# Altium PCB Test Plates - SMD to PLS Adapters.PcbDoc
Units mm, origin at the board's own origin, x right, y up, seen from the top; angles counter-clockwise.
Board outline 152.4 x 101.6 mm, 2 copper layers (Top Layer, Bottom Layer); 46 components, 53 nets, 154 pads, 0 vias.
Unrouted connection lines stored in the file: 27.
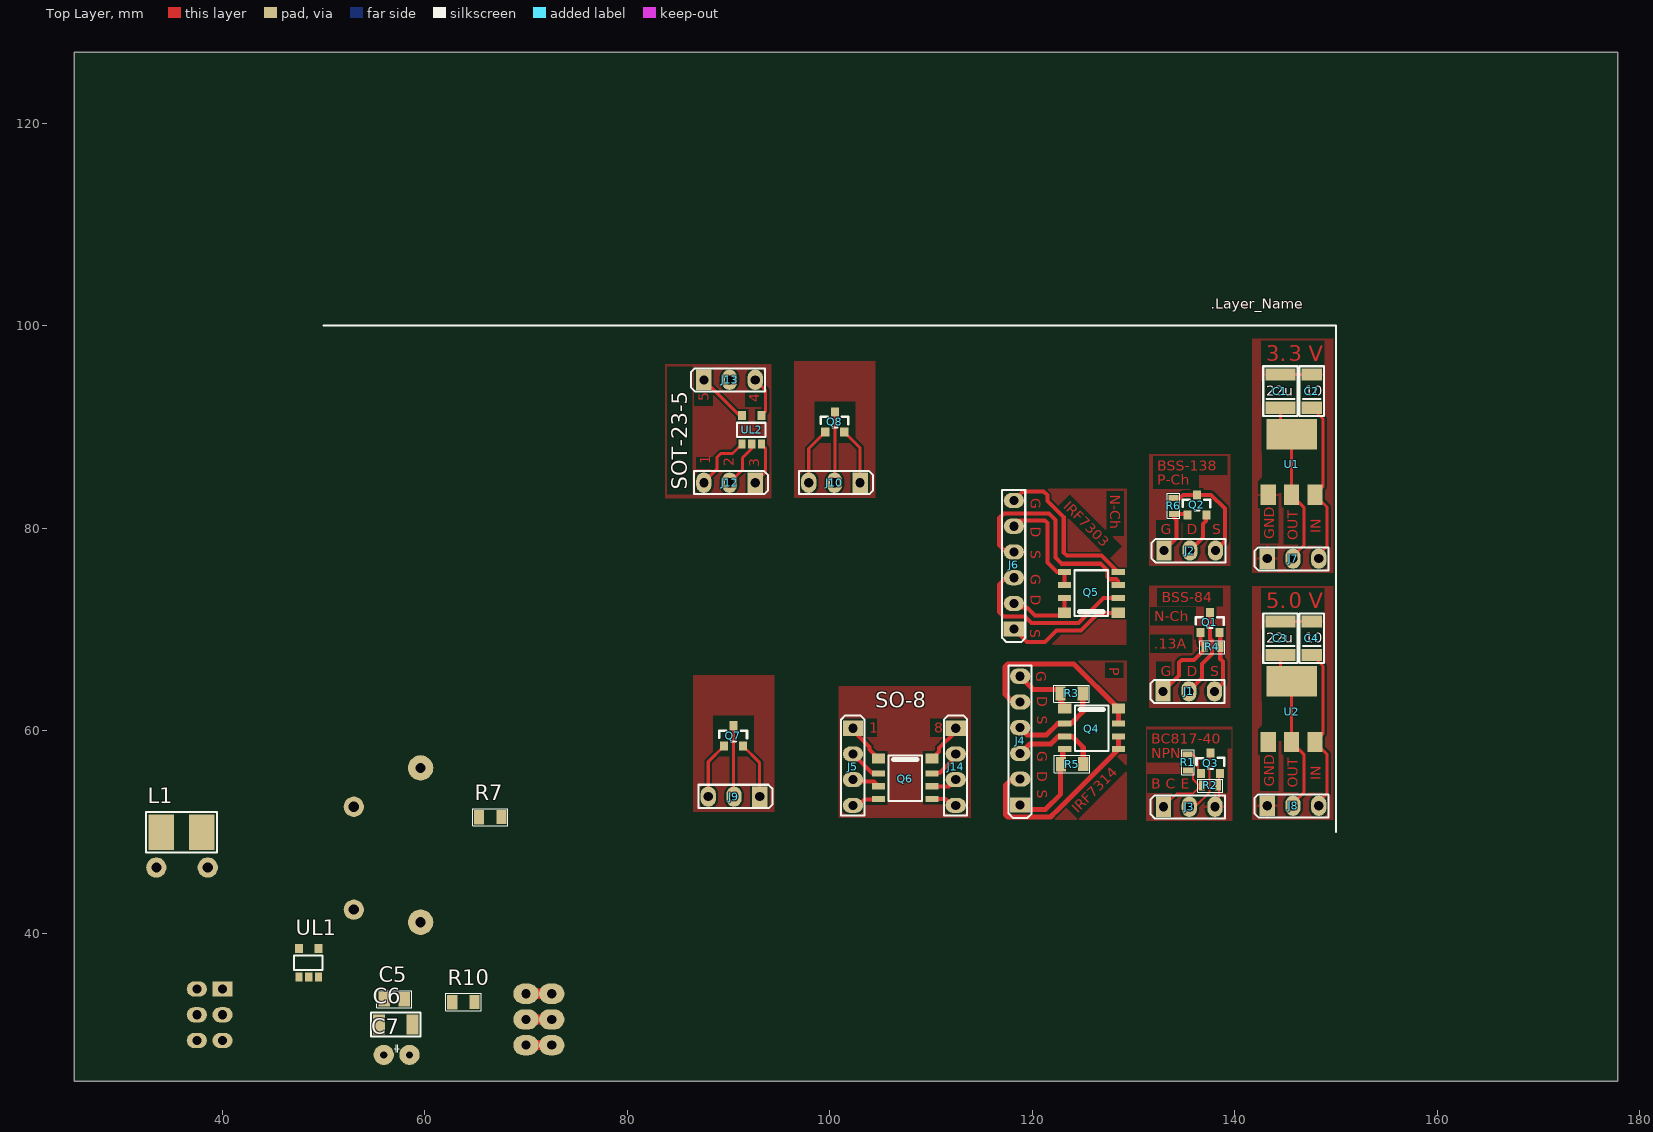
[diagram p0: Top Layer view]
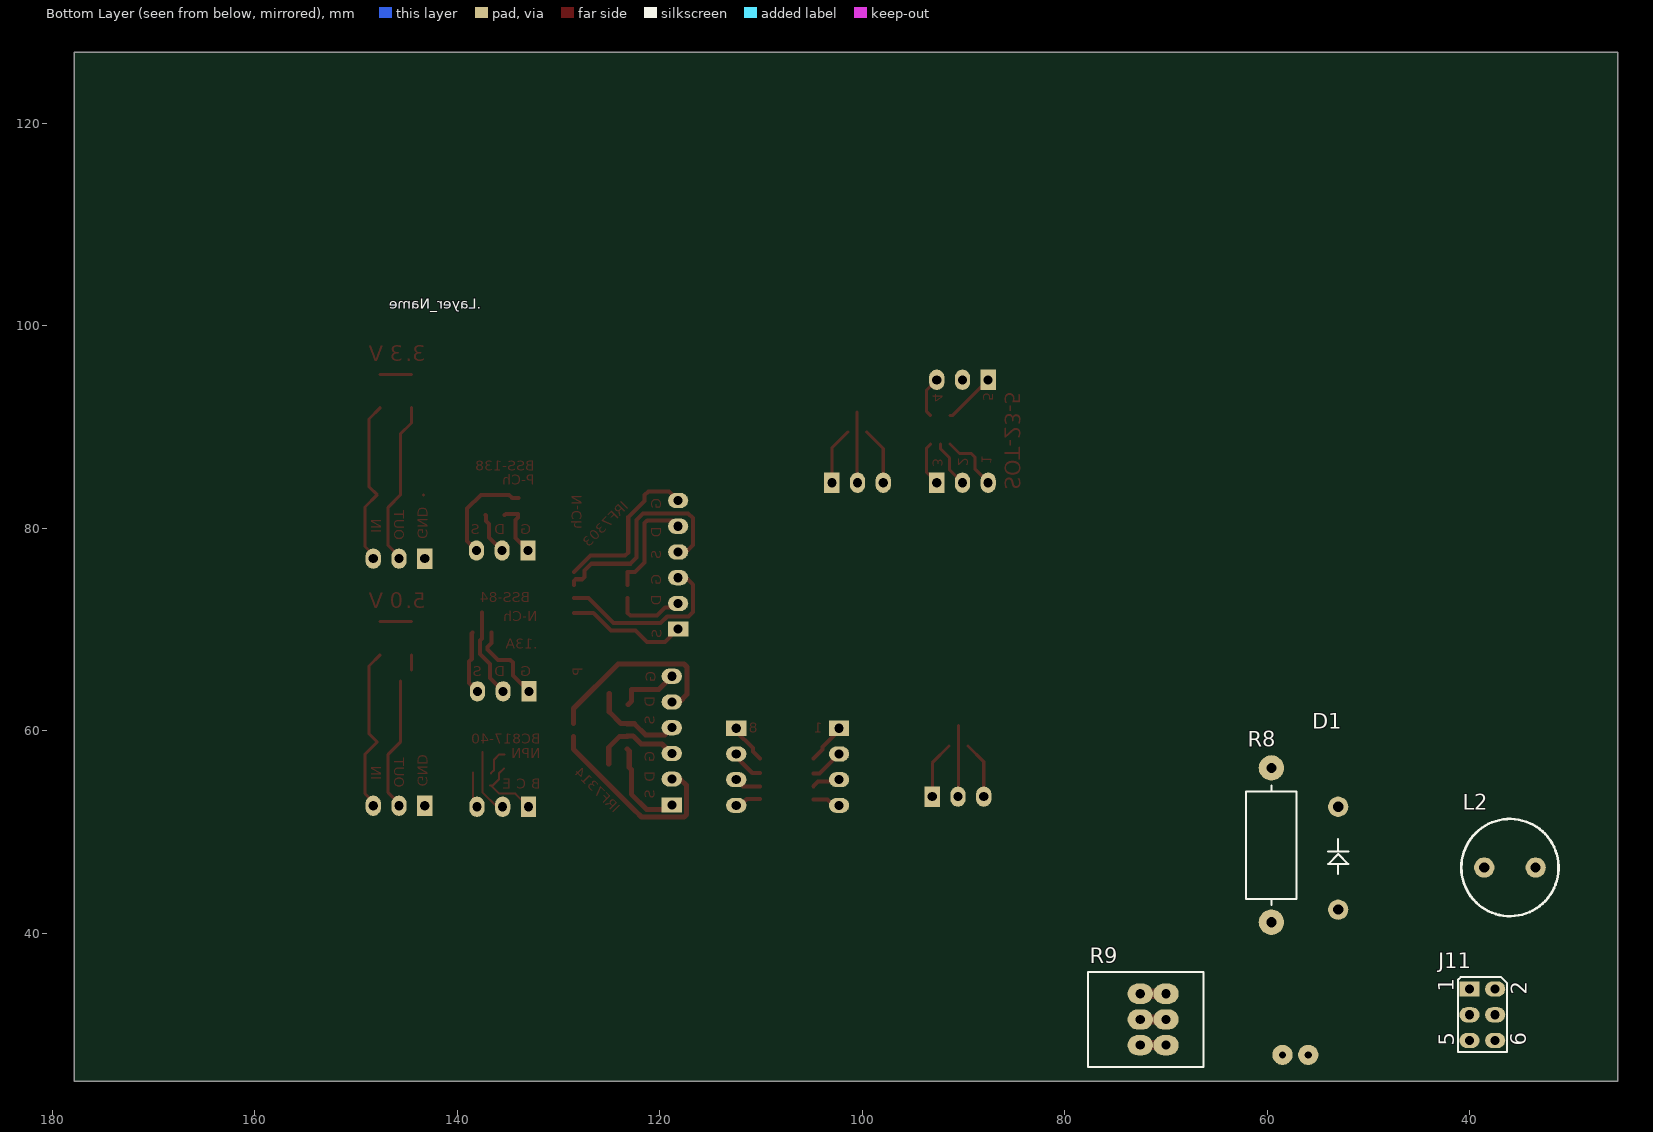
[diagram p1: Bottom Layer view, seen from below]
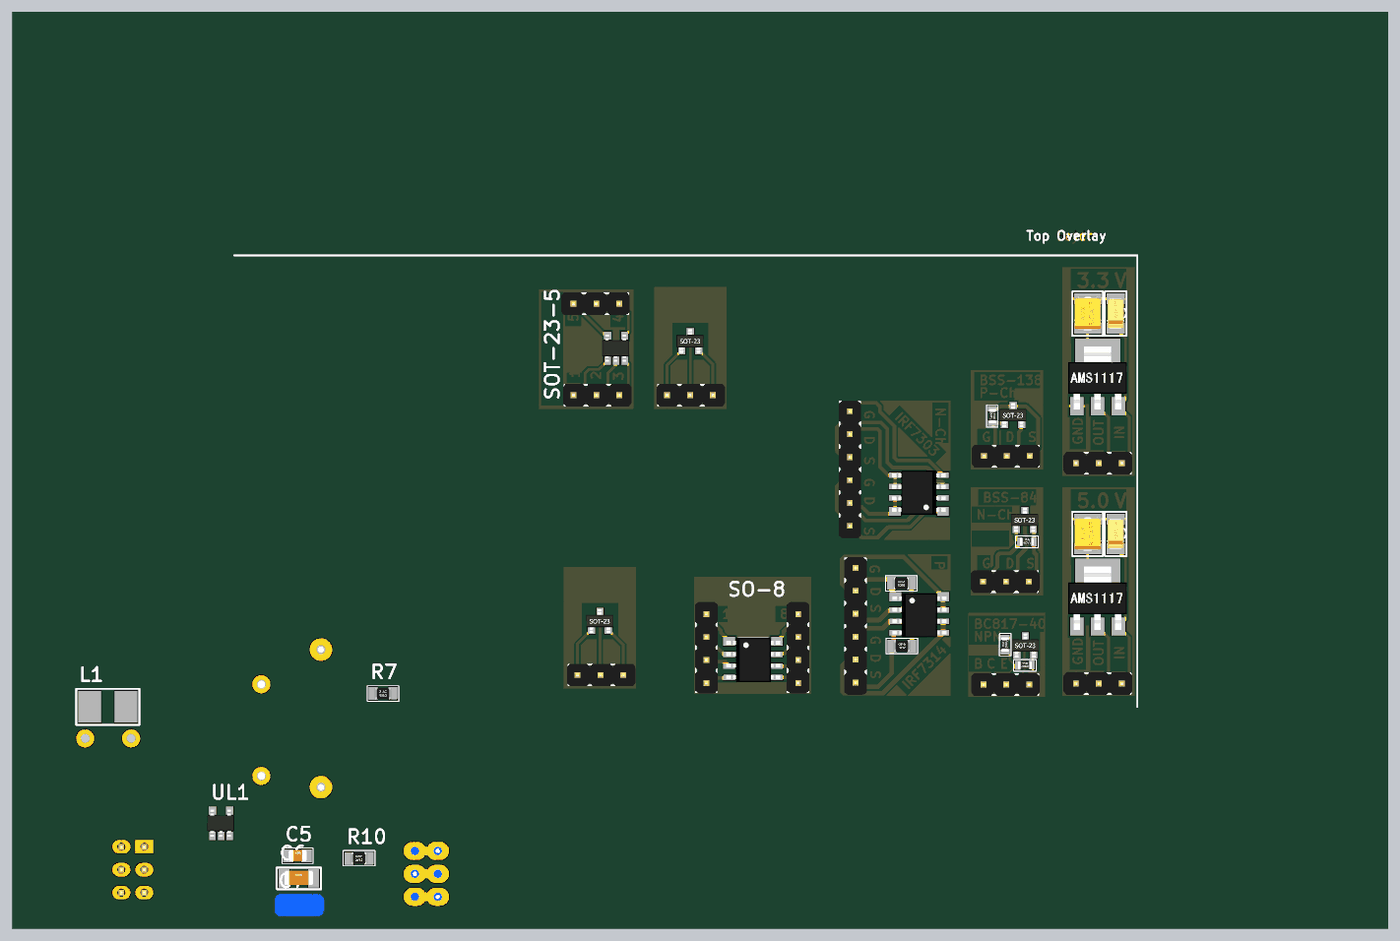
[diagram p2: 3D render of the assembled board from above, using the file's embedded part models]
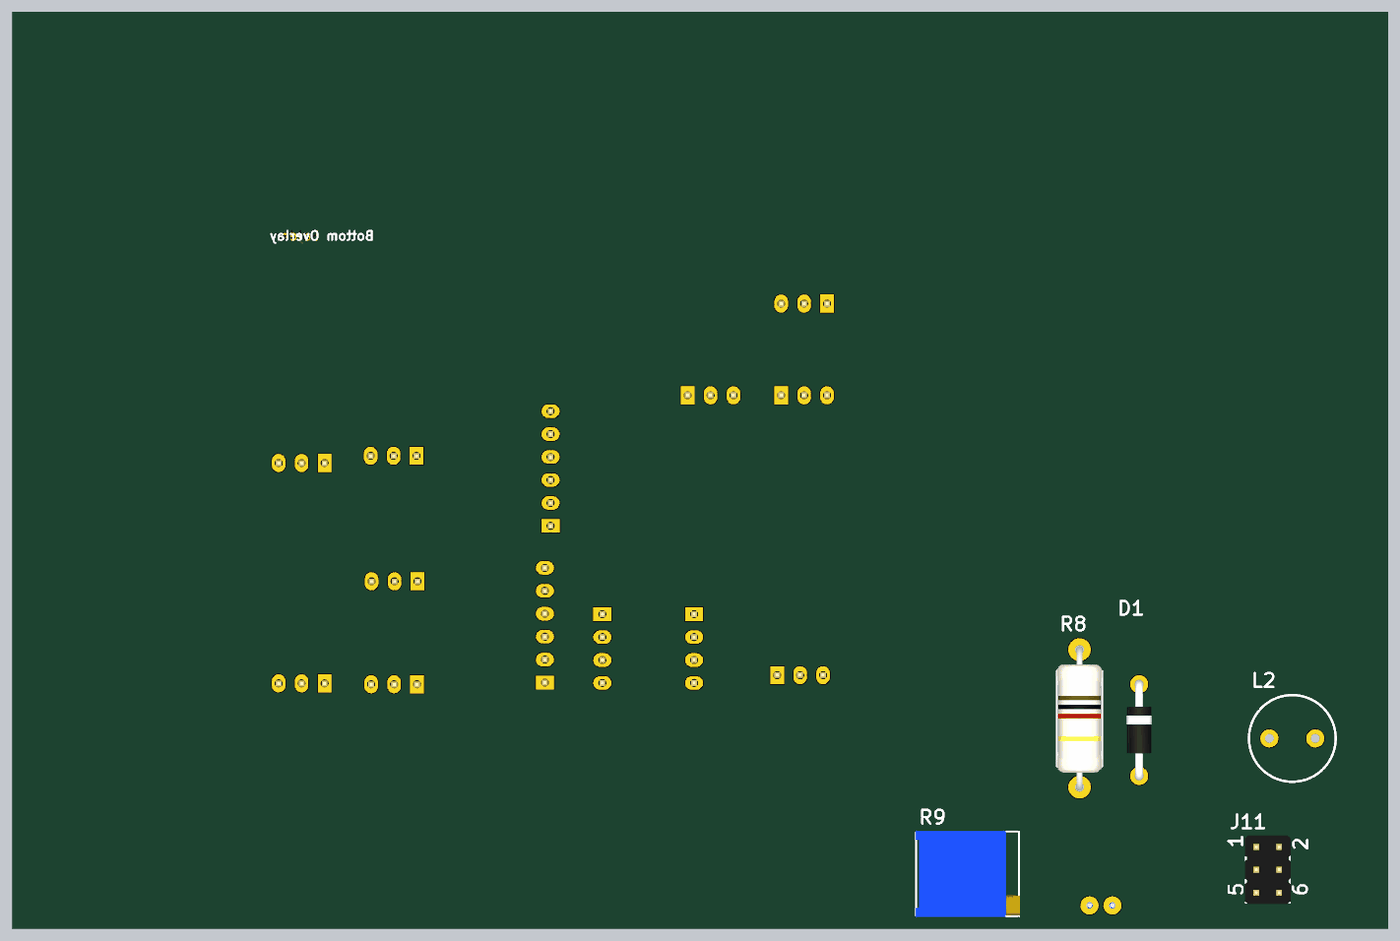
[diagram p3: 3D render of the assembled board from below, using the file's embedded part models]

## Layer stack, top to bottom
Top Solder: solder mask 0.0102, Solder Resist, Dk 3.5
Top Layer: signal copper 0.0356
Dielectric 1: dielectric 0.32, FR-4, Dk 4.8
Bottom Layer: signal copper 0.0356
Bottom Solder: solder mask 0.0102, Solder Resist, Dk 3.5

## Board outline
25.4,25.4 177.8,25.4 177.8,127 25.4,127

## Design rules (kind name [scope] priority, off if disabled: settings)
Clearance [All] p1: gap=0.2 ignorepadtopadclearanceinfootprint=FALSE except(0: Arc-Hole Track-Hole SMDPad-Hole THPad-Hole Via-Hole Fill-Hole Poly-Hole Region-Hole Text-Hole)
PolygonConnect [All] p1: connectstyle=Relief reliefconductorwidth=0.254 reliefentries=4 polygonreliefangle="90 Angle" airgapwidth=0.254
RoutingVias [All] p1: holewidth=0.711 width=1.27 viastyle="Through Hole" minholewidth=0.711 minwidth=1.27 maxholewidth=0.711 maxwidth=1.27
SolderMaskExpansion [All] p1: expansion=0.102
Width [All] p1: maxlimit=3 minlimit=0.2 preferedwidth=0.5
30 further rules are at their usual default settings.

## Components (designator, comment, footprint, x,y, rotation, side; value= is the part's Value field where it differs from the comment)
C1 "22u" "SMD 3528 Tantal (1210)" 144.5,91.9 r90 top
C2 "10" "SMD 1206 Tantal (3216)" 147.6,91.9 r90 top
C3 "22u" "SMD 3528 Tantal (1210)" 144.5,67.5 r90 top
C4 "10" "SMD 1206 Tantal (3216)" 147.6,67.5 r90 top
C5 "4.7uF" "SMD 0805 (2012)"#1 56,33.5 r0 top
C6 "4.7uF" "SMD 1206 (3216)" 55.5,31 r0 top
C7 "4.7uF" "Cap p2.54mm (2p)" 55.96,28 r0 top
D1 "1N5822" "Diode DO-41" 53,42.34 r90 bottom
J1 "PLS-3" "Line 2.54 X 3" 132.915,63.901 r90 top
J2 "PLS-3" "Line 2.54 X 3" 133.015,77.801 r90 top
J3 "PLS-3" "Line 2.54 X 3" 132.96,52.5 r90 top
J4 "connector" "Line 2.54 x 6" 118.8,52.69 r180 top
J5 "PLS-4" "Line 2.54 X 4" 102.28,60.26 r0 top
J6 "connector" "Line 2.54 x 6" 118.175,70.04 r180 top
J7 "AMS1117 3.3 / 5.0" "Line 2.54 X 3" 143.2,77 r90 top
J8 "AMS1117 3.3 / 5.0" "Line 2.54 X 3" 143.2,52.6 r90 top
J9 "PLS-3" "Line 2.54 X 3" 93.08,53.5 r270 top
J10 "PLS-3" "Line 2.54 X 3" 103,84.5 r270 top
J11 "Connector" "LINE 2.54 x 6D (2 x 3)" 40.04,34.5 r180 bottom
J12 "PLS-3" "Line 2.54 X 3" 92.64,84.5 r270 top
J13 "PLS-3" "Line 2.54 X 3" 87.56,94.66 r90 top
J14 "PLS-4" "Line 2.54 X 4" 112.44,60.26 r0 top
L1 "47 mkH" "47 mkH" 34,50 r0 top
L2 "680 mkH" "680 mkH" 33.5,46.5 r0 bottom
Q1 "BSS84" SOT-23 136.605,69.701 r0 top
Q2 "BSS138" SOT-23 135.305,81.301 r0 top
Q3 "BC817-40" SOT-23 136.66,55.8 r0 top
Q4 "IRF7314" SO8 123.2,62 r0 top
Q5 "IRF7303" SO8 128.475,71.855 r180 top
Q6 "SO-8" SO8 104.8,57.07 r0 top
Q7 "BSS84" SOT-23 89.55,58.5 r0 top
Q8 "BSS84" SOT-23 99.55,89.5 r0 top
R1 "1kOm" "SMD 0603 (1608)" 135.36,56.1 r90 top
R2 "10KOm" "SMD 0603 (1608)" 136.76,54.6 r0 top
R3 "10 kOm" "SMD 0805 (2012)"#2 124.9,63.7 r180 top
R4 "10KOm" "SMD 0603 (1608)" 136.98,68.276 r0 top
R5 "10 kOm" "SMD 0805 (2012)"#2 122.9,56.7 r0 top
R6 "10KOm" "SMD 0603 (1608)" 133.955,83.001 r270 top
R7 "0.1Om" "SMD 0805 (2012)"#2 67.5,51.5 r180 top
R8 "0.1Om" "Res 2W p15.24" 59.6,41.1 r90 bottom
R9 "КOm" "Res Adj 3296 Univ" 72.54,34.04 r180 bottom
R10 "0.1Om" "SMD 0805 (2012)"#2 62.8,33.2 r0 top
U1 "AMS 1117 3.3/5.0" "SOT-223-3 (AMS)" 145.6,90.3 r0 top
U2 "AMS 1117 3.3/5.0" "SOT-223-3 (AMS)" 145.6,65.9 r0 top
UL1 "ZXLD1360ET5TA" SOT-23-5 47.6,35.7 r0 top
UL2 "SOT-23-5" SOT-23-5 91.34,88.32 r0 top

## Footprints (in the part's own frame and the unit in brackets; to place one, negate y for a bottom-side part, rotate by r counter-clockwise, add the part's x,y. Pads: shape width x height; smd on the part's side, far side on the other; paste and mask are expansions set on the pad)
"47 mkH" [mm] "47 mkH SMD"
  rect 2.5x3.5 smd: 1(0,0) 2(4,0)
  silkscreen extent -1.5,-2 5.5,2
"680 mkH" [mm] "P5.08mm"
  round 2 hole 1: 1(0,0) 2(5.08,0)
  silkscreen extent -2.26,-4.8 7.34,4.8
"Cap p2.54mm (2p)" [mm] "Disk small"
  round 2 hole 0.7: 1(0,0) 2(2.54,0)
  silkscreen extent 1.02,0.27 1.55,1, body extent -1.5,-1.22 4,1.28, height 5.5
"Diode DO-41" [mm] "p10.16mm"
  round 2 hole 1: A(0,0) K(10.16,0)
  silkscreen extent 3.5,-1 7,1, body extent -0.43,-1.37 10.59,1.37, height 2.73
"Line 2.54 X 3" [mm]
  rect 2x1.5 hole 0.9: 1(0,0)
  oval 2x1.5 hole 0.9: 2(0,-2.54) 3(0,-5.08)
  silkscreen extent -1.17,-6.05 1.12,1.27, body extent -1.27,-6.24 1.22,1.38, height 8.2
"Line 2.54 X 4" [mm]
  rect 2x1.5 hole 0.9: 1(0,0)
  oval 2x1.5 hole 0.9: 2(0,-2.54) 3(0,-5.08) 4(0,-7.62)
  silkscreen extent -1.17,-8.62 1.12,1.27, body extent -1.25,-8.78 1.25,1.38, height 8.2
"Line 2.54 x 6" [mm]
  rect 2x1.5 hole 0.9: 1(0,0)
  oval 2x1.5 hole 0.9: 2(0,-2.54) 3(0,-5.08) 4(0,-7.62) 5(0,-10.16) 6(0,-12.7)
  silkscreen extent -1.12,-13.75 1.15,1.28, body extent -1.25,-13.86 1.25,1.38, height 8.2
"LINE 2.54 x 6D (2 x 3)" [mm]
  rect 2x1.5 hole 0.9: 1(0,0)
  oval 2x1.5 hole 0.9: 2(2.54,0) 3(0,-2.54) 4(2.54,-2.54) 5(0,-5.08) 6(2.54,-5.08)
  silkscreen extent -1.15,-6.2 3.72,1.17, body extent -1.26,-6.36 3.82,1.26, height 8.5
"Res 2W p15.24" [mm] "D5mm, Pin2pin 15.24mm"
  round 2.5 hole 1: 1(0,0) 2(15.24,0)
  silkscreen extent 1.7,-2.5 13.5,2.5, body extent -0.35,-2.5 15.59,2.5, height 5
"Res Adj 3296 Univ" [mm]
  oval 2.5x2 hole 0.9: 1(0,0) 1(2.54,0) 2(0,-2.54) 2(2.54,-2.54) 3(0,-5.08) 3(2.54,-5.08)
  Bottom Layer lines w1: 2.54,-5.08 0,-5.08 ; 2.54,-2.54 0,-2.54 ; 2.54,0 0,0
  silkscreen extent -5.15,-7.22 6.25,2.15, body extent -5.22,-7.3 6.33,2.23, height 4.82
"SMD 0603 (1608)" [mm]
  rect 0.6x1 smd: 1(0,0) 2(1.575,0.025)
  silkscreen extent -0.45,-0.65 2.02,0.63, body extent 0.03,-0.4 1.58,0.45, height 0.45
"SMD 0805 (2012)"#1 [mil]
  rect 45x55 smd: 1(0,0) 2(78.74,0)
  silkscreen extent -29,-33 107,33, body extent 1,-25 80,25, height 31
"SMD 0805 (2012)"#2 [mil]
  rect 39.37x55.12 smd: 1(-2.95,0) 2(83.66,0.98)
  silkscreen extent -29,-32 109,34, body extent 1,-24 80,26, height 18
"SMD 1206 (3216)" [mm]
  rect 1.2x2 smd: 1(0,0) 2(3.3,0)
  silkscreen extent -0.8,-1.2 4.1,1.2, body extent 0.05,-0.75 3.25,0.85, height 1
"SMD 1206 Tantal (3216)" [mm]
  rect 1.2x2 smd: GND(3.3,0) VCC(0,0)
  silkscreen extent -0.8,-1.2 4.1,1.2, body extent -0.05,-0.9 3.35,0.9, height 1.8
"SMD 3528 Tantal (1210)" [mm]
  rect 1.2x3 smd: GND(3.3,0) VCC(0,0)
  silkscreen extent -0.8,-1.7 4.1,1.7, body extent -0.2,-1.46 3.5,1.47, height 2.03
SO8 [mm]
  rect 1.3x1 smd: 1(0,0.2) 8(5.3,0.2)
  rect 1.3x0.6 smd: 2(0,-1.27) 3(0,-2.54) 4(0,-3.81) 5(5.3,-3.81) 6(5.3,-2.54) 7(5.3,-1.27)
  silkscreen extent 1,-4 4.3,0.5, body extent -0.32,-4.33 5.67,0.57, height 1.6
SOT-23 [mm]
  rect 0.8x0.9 smd: 1(0,0) 2(1.875,0) 3(0.95,2)
  silkscreen extent -0.45,0.45 2.27,1.53, body extent -0.57,-0.32 2.43,2.32, height 1.08
SOT-23-5 [mm]
  rect 0.7x0.9 smd: 1(0,0) 2(0.95,0) 3(1.9,0)
  rect 0.8x0.9 smd: 4(1.9,2.8) 5(0,2.8)
  silkscreen extent -0.5,0.7 2.3,2.1, body extent -0.6,-0.1 2.4,2.9, height 1.42
"SOT-223-3 (AMS)" [mm]
  rect 1.5x2 smd: 1(-2.3,-7) 2(0,-7) 3(2.3,-7)
  rect 5x3 smd: 2(0,-1)
  body extent -3.25,-7.37 3.25,-0.38, height 1.85

## Part data
C1 C2 C3 C4: library part "Cap Tantal", "Capacitor"
C5 C6: library part "Cap SMD 0402-1812", "Capacitor"
C7: library part "Cap Ceramic", "Capacitor"
D1: library part "D Shotki All", "Shotki  Diode", PackageReference=DO-201
J1 J2 J3 J5 J9 J10 J12 J13 J14: "Vert, Sgl line, Male"
J4 J6: library part PLS-6, "Vert, Sgl line, Male"
J7 J8: library part PLS-3, "Vert, Sgl line, Male"
J11: library part "PLD-6 (2 x 3)", "Vert, Dbl line, Male"
L1: library part "Inductor 47 mkH", "Inductor"
L2: library part "Inductor 680mkH", "Inductor"
Q1 Q7 Q8: "P-Channel -50V - 10-1? - 0.13A", I d - Drain current (continuous) at TC = 25°C="0.13 A", Open Voltage="-0.8...-2.0 V", Datasheet=http://tec.org.ru/board/0-0-0-515-20, Monufacturer=Farchild, Name=BSS84, RDS=<10Om, V DSS (v)=60
Q2: "N-Channel 50V - 0.7-1? - 0.22A", I d - Drain current (continuous) at TC = 25°C="0.22 A", I d - Drain current (continuous) at TC = 100°C="50 A", Datasheet=http://tec.org.ru/board/0-0-0-511-20, Monufacturer=Farchild, Name=BSS138, RDS=<6Om, V DSS (v)=60
Q3: "NPN 45 V, 500 mA NPN general-purpose transistor", Name=BC817-40, type="45 V, 500 mA NPN general-purpose transistors", url=http://lib.chipdip.ru/156/DOC000156781.pdf
Q4: "Dual P-Ch  20V - 0.058? - 5.3A", I d - Drain current (continuous) at TC = 25°C="5.3 A", I d - Drain current (continuous) at TC = 100°C="4.3 A", C ISS Входная емкость="780 pF", C OSS Выходная емкость="470 pF", Datasheet=http://tec.org.ru/_bd/2/277_IRF7314-IR.pdf, Monufacturer=IOR, Name=IRF7314, RDS Сопротивление Сток-Исток="0.058 Om", url=http://tec.org.ru/board/49-1-0-277, V DSS (v)=20V, VGS Макс напр на гейте="+-12 V", VGS Порог Открытия="-0.7 V"
Q5: "Dual N-Ch  30V - 0.05? - 4.9A", I d - Drain current (continuous) at TC = 25°C="4.9 A", I d - Drain current (continuous) at TC = 70°C="3.9 A", Manufacturer=Farchild, C In=520pF, C Out=180pF, Datasheet=http://tec.org.ru/board/0-0-0-3164-20, Name=IRF7303, RDS=<0.05Om, V DSS (v)="30 v"
Q6: library part IRF7303, "Dual N-Ch  30V - 0.05? - 4.9A", I d - Drain current (continuous) at TC = 25°C="4.9 A", I d - Drain current (continuous) at TC = 70°C="3.9 A", Manufacturer=Farchild, C In=520pF, C Out=180pF, Datasheet=http://tec.org.ru/board/0-0-0-3164-20, Name=IRF7303, RDS=<0.05Om, V DSS (v)="30 v"
R1 R2 R4 R6: library part "Res SMD 0603"
R3 R5 R7 R8 R10: library part "Res All Types"
R9: library part "Res Adj 3296"
U1 U2: library part AMS1117_FIX, "Voltage Regulator SOT-223-3", Capacitors="In: 10mF; Out: 22mF", Case=SOT-223, Max Voltage In (V)=15, Dropuot=1-1.3V, Dtatsheet=https://lib.chipdip.ru/029/DOC001029248.pdf, I output (A)=1, Name="AMS1117 1.5 / 1.8 / 2.5 / 2.85 / 3.3 / 5.0", t=-40...+125°C, V Out="1.5 / 1.8 / 2.5 / 2.85 / 3.3 / 5.0"
UL1: "Led Driver - 1A, 7-30V In", ComponentLink1URL=www.zetex.com, DataSheet URL=https://lib.chipdip.ru/296/DOC000296166.pdf, Name=ZXLD1360ET5TA, PackageDescription=SOT-23-5
UL2: library part ZXLD1360ET5TA, "Led Driver - 1A, 7-30V In", ComponentLink1URL=www.zetex.com, DataSheet URL=https://lib.chipdip.ru/296/DOC000296166.pdf, Name=ZXLD1360ET5TA, PackageDescription=SOT-23-5

## Nets (pads, with @x,y where several pads share a name; then routed paths per layer and width w, separated by ;. In a path a pad name is that pad's centre, name@x,y a point inside that pad or via, vN(x,y) a via of type N, cw(c..) or ccw(c..) an arc to the next point about the centre after c; other vN are vias at no path point)
AMS5-GND: C3.GND C4.GND J8.1 U2.1 | length 3.1
  Top Layer w0.3: C3.GND C4.GND
AMS5-IN: C4.VCC J8.3 U2.3 | length 16.3
  Top Layer w0.3: C4.VCC 148.7,66.4 148.7,59.7 U2.3 149.1,57.7 149.1,57.4 149.1,53.8 J8.3@148.2,52.9
AMS5-OUT: C3.VCC J8.2 U2.2 | length 14.5
  Top Layer w0.3: U2.2@144.5,66 C3.VCC ; U2.2@145.6,58.879 146.804,57.675 146.804,53.896 J8.2@145.74,52.832 ; U2.2@145.6,58.9 U2.2@145.6,64.9
AMS33-GND: C1.GND C2.GND J7.1 U1.1 | length 3.1
  Top Layer w0.3: U1.1@143.3,83.279 U1.1 ; C1.GND C2.GND
AMS33-IN: C2.VCC J7.3 U1.3 | length 16.3
  Top Layer w0.3: C2.VCC 148.7,90.8 148.7,84.1 U1.3 149.1,82.1 149.1,81.8 149.1,78.2 J7.3@148.2,77.3
AMS33-OUT: C1.VCC J7.2 U1.2 | length 16.3
  Top Layer w0.3: C1.VCC 144.5,90.4 145.6,89.3 145.6,83.3 145.6,83.279 146.804,82.075 146.804,78.296 145.74,77.232 J7.2
B-817: Q3.1 R1.2 | length 2.7
  Top Layer w0.2: R1.2 135.835,57.675 136.359,57.151 136.359,56.101 Q3.1
E-817: J3.2 Q3.3 | length 6.6
  Top Layer w0.2: J3.2 136.06,52.5 137.51,53.95 Q3.3@137.51,57.9
GND1: J3.3 Q3.2 R2.2 | length 3.6
  Top Layer w0.2: J3.3 138.435,52.895 138.435,55.8 Q3.2@138.435,55.9
IRF7303-D1: J6.2 Q5.7 Q5.8 | length 7.1
  Top Layer w0.4: J6.2 118.58,72.175 119.45,72.175 120.25,71.375 122.895,71.375 Q5.8 Q5.7
IRF7303-D2: J6.5 Q5.5 Q5.6 | length 10.9
  Top Layer w0.4: J6.5 118.75,80.775 121.225,80.775 121.5,80.5 121.5,76.6 122.435,75.665 Q5.5 Q5.6
IRF7303-G1: J6.3 Q5.2 | length 17.7
  Top Layer w0.4: J6.3 117.395,75.12 116.7,74.425 116.7,71.75 117.15,71.3 119.25,71.3 119.9,70.65 124.55,70.65 127.025,73.125 Q5.2
IRF7303-G2: J6.6 Q5.4 | length 16.4
  Top Layer w0.4: J6.6 119.085,83.65 121.115,83.65 121.5,83.265 121.5,82.7 123.1,81.1 123.1,77.6 123.4,77.3 126.84,77.3 Q5.4
IRF7303-S1: J6.1 Q5.1 | length 12
  Top Layer w0.4: J6.1 119.465,68.75 121.25,68.75 122.4,69.9 124.8,69.9 126.555,71.655 Q5.1
IRF7303-S2: J6.4 Q5.3 | length 22
  Top Layer w0.4: J6.4 117.415,77.66 116.725,78.35 116.725,81 117.2,81.475 121.625,81.475 122.3,80.8 122.3,77.1 122.9,76.5 126.75,76.5 127.425,75.825 127.425,75.199 127.659,74.965 128.285,74.965 128.475,74.775 Q5.3
IRF7314-D1: J4.2 Q4.5 Q4.6 | length 19.9
  Top Layer w0.5: J4.2 117.955,55.23 117.35,54.625 117.35,51.725 117.575,51.5 117.604,51.5 117.614,51.49 119.986,51.49 119.996,51.5 121.8,51.5 122.35,52.05 ; 122.355,52.045 Q4.5 Q4.6
IRF7314-D2: J4.5 Q4.7 Q4.8 | length 19.1
  Top Layer w0.5: J4.5 118.05,62.85 117.3,63.6 117.3,66.3 117.6,66.6 124.1,66.6 Q4.8 Q4.7
IRF7314-G1: J4.1 Q4.4 R5.1 | length 9.4
  Top Layer w0.5: J4.1 119.265,52.225 121.275,52.225 122.8,53.75 122.8,56.175 123,56.375 123,57.99 Q4.4
IRF7314-G2: J4.4 Q4.2 R3.1 | length 9.2
  Top Layer w0.5: J4.4@118.8,60.28 119.48,59.6 121.4,59.6 122.5,60.7 Q4.2@123.2,60.7 ; Q4.2 123.83,60.73 124.975,61.875 R3.1
IRF7314-S1: J4.3 Q4.3 R5.2 | length 9.1
  Top Layer w0.5: J4.3@118.8,57.74 119.76,58.7 121.82,58.7 122.62,59.5 Q4.3@123.2,59.5 ; Q4.3 123.94,59.46 125.025,58.375 R5.2
IRF7314-S2: J4.6 Q4.1 R3.2 | length 6.1
  Top Layer w0.5: J4.6@118.8,65.36 120.06,64.1 122.775,64.1 R3.2 122.775,62.925 Q4.1@123.1,62.6
"LED GND": J11.1 J11.3 J11.5 L1.1 L2.1
"LED VCC": J11.2 J11.4 J11.6 R7.1 R8.1 R10.1 UL1.4
"LedDrv GND": C5.1 C6.1 C7.1 R9.3 UL1.2
"LedDrv VCC": C5.2 C6.2 C7.2 D1.K R7.2 R8.2 R9.1 R10.2 UL1.5
NetD1_A: D1.A L1.2 L2.2 UL1.1
NetJ1_1: J1.1 Q1.1 R4.1 | length 8.3
  Top Layer w0.4: J1.1 134.488,65.474 134.488,66.734 134.755,67.001 135.955,67.001 136.98,68.026 R4.1 136.605,68.651 Q1.1
NetJ1_2: J1.2 Q1.3 | length 8.8
  Top Layer w0.4: J1.2 136.755,65.201 136.755,66.601 137.755,67.601 137.755,68.901 137.555,69.101 Q1.3
NetJ1_3: J1.3 Q1.2 R4.2 | length 6.3
  Top Layer w0.4: J1.3 138.821,64.727 138.821,66.834 138.555,67.101 R4.2 138.555,69.626 Q1.2
NetJ2_1: J2.1 Q2.1 R6.2 | length 5.6
  Top Layer w0.4: J2.1 134.255,79.041 134.255,80.801 133.98,81.076 R6.2 135.18,81.426 Q2.1
NetJ2_2: J2.2 Q2.2 | length 4.2
  Top Layer w0.4: J2.2 136.855,79.101 136.855,80.401 137.155,80.701 137.155,81.276 Q2.2
NetJ2_3: J2.3 Q2.3 R6.1 | length 10.3
  Top Layer w0.4: R6.1 134.555,83.001 134.855,83.301 Q2.3 137.655,83.301 139.021,81.934 139.021,78.727 J2.3
NetJ3_1: J3.1 R1.1 R2.1 | length 7
  Top Layer w0.2: J3.1 134.26,53.8 135.851,53.8 136.56,54.509 R2.1@136.56,54.6 ; R1.1@135.36,56.3 135.86,55.8 135.86,55.2 136.46,54.6 R2.1@136.56,54.6 ; R2.1 R2.1@136.56,54.6
NetJ9_1: J9.1 Q7.2 | length 5.7
  Top Layer w0.3: Q7.2 93.08,56.845 J9.1
NetJ9_2: J9.2 Q7.3 | length 7
  Top Layer w0.3: Q7.3 90.5,53.54 J9.2
NetJ9_3: J9.3 Q7.1 | length 5.6
  Top Layer w0.3: J9.3 88,56.95 Q7.1
NetJ10_1: J10.1 Q8.2 | length 5.7
  Top Layer w0.3: Q8.2 103,87.925 J10.1
NetJ10_2: J10.2 Q8.3 | length 7
  Top Layer w0.3: J10.2 100.5,84.54 Q8.3
NetJ10_3: J10.3 Q8.1 | length 5.7
  Top Layer w0.3: J10.3 97.92,87.87 Q8.1
NetJ12_1: J12.1 UL2.3 | length 4.4
  Top Layer w0.3: J12.1 93.64,85.5 93.64,87.92 UL2.3
NetJ12_2: J12.2 UL2.2 | length 4.7
  Top Layer w0.3: J12.2 91.38,85.78 91.38,86.96 92.29,87.87 UL2.2
NetJ12_3: J12.3 UL2.1 | length 6.1
  Top Layer w0.3: J12.3 87.56,84.54 88.84,85.82 88.84,86.981 89.234,87.375 90.395,87.375 UL2.1
NetJ13_1: J13.1 UL2.5 | length 5.2
  Top Layer w0.3: J13.1 91.1,91.12 UL2.5
NetJ13_3: J13.3 UL2.4 | length 4.1
  Top Layer w0.3: J13.3 93.64,93.66 93.64,91.52 UL2.4
NetR9_2: R9.2 UL1.3
So8-1: J5.1 Q6.1 | length 4
  Top Layer w0.4: J5.1 102.28,60.02 103.9,58.4 103.9,58.17 Q6.1
So8-2: J5.2 Q6.2 | length 3.3
  Top Layer w0.4: J5.2 104.2,55.8 Q6.2
So8-3: J5.3 Q6.3 | length 2.7
  Top Layer w0.4: J5.3@102.28,54.98 104.35,54.98 Q6.3
So8-4: J5.4 Q6.4 | length 2.8
  Top Layer w0.4: J5.4 102.88,52.64 103.44,53.2 Q6.4@104.8,53.2
So8-5: J14.1 Q6.8 | length 4
  Top Layer w0.4: Q6.8 110.8,57.97 110.8,58.3 112.44,59.94 J14.1
So8-6: J14.2 Q6.7 | length 3.3
  Top Layer w0.4: Q6.7@110.1,55.858 110.858,55.858 112.44,57.44 J14.2
So8-7: J14.3 Q6.6 | length 2.6
  Top Layer w0.4: Q6.6@110.1,54.502 111.762,54.502 J14.3
So8-8: J14.4 Q6.5 | length 2.6
  Top Layer w0.4: Q6.5 111.4,53.26 112.02,52.64 J14.4
pads on no net: J13.2

## Polygon pours and split planes (outlines as drawn)
no net on Top Layer "Bottom Layer-No Net" (solid, pour order 13): 139.555,76.301 139.555,87.301 131.555,87.301 131.555,76.301
no net on Top Layer "Bottom Layer-No Net" (solid, pour order 51): 94.24,96.22 94.24,82.97 83.74,82.97 83.74,96.22
no net on Top Layer "Bottom Layer-No Net" (solid, pour order 17): 86.5,52 94.5,52 94.5,65.5 86.5,65.5
no net on Top Layer "Bottom Layer-No Net" (solid, pour order 15): 96.5,83 104.5,83 104.5,96.5 96.5,96.5
no net on Top Layer "Top Layer-No Net" (solid, pour order 9): 129.3,57.7 129.3,51.2 122.2,51.2 122.2,51.5 128.4,57.7
no net on Top Layer "Top Layer-No Net" (solid, pour order 7): 124.3,66.9 129.3,66.9 129.3,62.9 128.3,62.9
GND1 on Top Layer "Top Layer-No Net" (solid, pour order 6): 139.76,51.1 131.26,51.1 131.26,60.4 139.76,60.4
AMS5-GND on Top Layer "Top Layer-No Net" (solid, pour order 4): 149.7,51.2 141.7,51.2 141.7,74.3 149.4,74.3 149.7,74.3 149.7,51.2
AMS33-GND on Top Layer "Top Layer-No Net" (solid, pour order 5): 149.7,75.6 141.7,75.6 141.7,98.7 149.4,98.7 149.7,98.7 149.7,75.6
no net on Top Layer "Bottom Layer-No Net" (solid, pour order 11): 139.555,62.301 139.555,68.301 139.555,74.301 131.555,74.301 131.555,62.301
no net on Top Layer "Top Layer-No Net" (solid, pour order 53): 121.025,83.9 129.3,83.9 129.3,75.625 123.4,77.3
no net on Top Layer "Top Layer-No Net" (solid, pour order 55): 129.275,71 129.275,68.5 121.9,68.5 121.9,68.525 124.375,71
no net on Top Layer "Bottom Layer-No Net" (solid, pour order 57): 100.9,51.4 113.9,51.4 113.9,64.4 100.9,64.4

## Other copper
Top Layer:
  pour cut-out: 135.851,53.8 135.922,53.871 139.26,53.871 139.26,58.301 134.76,58.301 134.76,53.801
  pour cut-out: 102.5,92.5 98.5,92.5 98.5,88.45 102.45,88.45 102.5,88.5
  pour cut-out: 88.5,57.5 92.5,57.5 92.5,61.5 88.5,61.5
  pour cut-out: 148.7,84.4 148.7,94.6 142.6,94.5 142.7,85.058 142.296,84.654 142.296,83.527 148.527,83.527 148.6,83.6
  pour cut-out: 148.7,59.9 148.7,70.1 142.6,70 142.7,60.558 142.296,60.154 142.296,59.027 148.527,59.027 148.6,59.1
  pour cut-out: 147.1,54.7 147.155,53.945 148.749,53.945 148.749,54.7
  pour cut-out: 144.8,57.466 144.8,57.7 146.283,57.7 146.417,57.566 146.386,57.535 146.386,57.466
  pour cut-out: 144.8,81.866 144.8,82.1 146.283,82.1 146.417,81.966 146.386,81.935 146.386,81.866
  pour cut-out: 147.1,79.1 147.155,78.345 148.749,78.345 148.749,79.1
  pour cut-out: 139.021,80.601 139.021,81.934 137.655,83.301 134.855,83.301 134.555,83.001 133.555,83.001 133.355,82.801 133.255,80.601
  pour cut-out: 109.25,57.97 111.334,57.976 111.247,61.21 113.64,61.21 113.5,52.76 111.247,52.76 109.25,52.76
  pour cut-out: 105.65,57.97 105.65,52.685 101.2,52.685 101.08,61.21 103.48,61.21 103.4,57.97
  text ".Layer_Name" at 137.6,101.7 h1
  text "3." at 143.1,96.5 h1.5
  text "3" at 145.3,96.5 h1.5
  text "V" at 147.3,96.5 h1.5
  text "5" at 88.04,92.52 h1 r90
  text "4" at 93.04,92.42 h1 r90
  text "1" at 88.2,86.3 h1 r90
  text "2" at 90.54,86.12 h1 r90
  text "3" at 93.04,86.02 h1 r90
  text "BSS-138" at 132.355,85.701 h1
  text "P-Ch" at 132.355,84.301 h1
  text "SOT-23-5" at 85.94,83.82 h1.52 r90
  text "N-Ch" at 127.7,83.3 h1 r270
  text "G" at 119.825,82.975 h1 r270
  text "IRF7303" at 123,82.1 h1 r315
  text "D" at 119.825,80.15 h1 r270
  text "IN" at 148.5,79.5 h1 r90
  text "G" at 132.655,79.401 h1
  text "D" at 135.255,79.401 h1
  text "S" at 137.755,79.401 h1
  text "GND" at 143.9,78.9 h1 r90
  text "OUT" at 146.2,78.8 h1 r90
  text "S" at 119.825,77.85 h1 r270
  text "G" at 119.825,75.475 h1 r270
  text "D" at 119.825,73.45 h1 r270
  text "BSS-84" at 132.755,72.701 h1
  text "5." at 143.1,72.1 h1.5
  text "0" at 145.3,72.1 h1.5
  text "V" at 147.3,72.1 h1.5
  text "N-Ch" at 132.055,70.801 h1
  text "S" at 119.8,70.05 h1 r270
  text ".13A" at 132.055,68.101 h1
  text "P" at 127.6,66.3 h1 r270
  text "G" at 120.4,65.9 h1 r270
  text "G" at 132.655,65.401 h1
  text "D" at 135.255,65.401 h1
  text "S" at 137.555,65.401 h1
  text "D" at 120.5,63.4 h1 r270
  text "S" at 120.5,61.5 h1 r270
  text "1" at 103.9,59.8 h1
  text "8" at 110.3,59.8 h1
  text "BC817-40" at 131.76,58.7 h1
  text "G" at 120.5,58 h1 r270
  text "NPN" at 131.76,57.3 h1
  text "D" at 120.5,56.025 h1 r270
  text "IN" at 148.5,55.1 h1 r90
  text "GND" at 143.9,54.5 h1 r90
  text "OUT" at 146.2,54.4 h1 r90
  text "B" at 131.76,54.3 h1
  text "C" at 133.16,54.3 h1
  text "E" at 134.66,54.3 h1
  text "S" at 120.5,54.175 h1 r270
  text "IRF7314" at 124.5,51.8 h1 r45
Bottom Layer:
  text ".Layer_Name" at 137.6,101.7 h1

## Silkscreen, mask and mechanical layers (free items; w line width, h text height)
Top Overlay:
  lines w0.2: 50,100 150,100 150,50
  text ".Layer_Name" at 137.6,101.7 h1
Bottom Overlay:
  text ".Layer_Name" at 137.6,101.7 h1
Top Solder:
  text ".Layer_Name" at 137.6,101.7 h1
Bottom Solder:
  text ".Layer_Name" at 137.6,101.7 h1

## Text inside footprints (layer, text, board x,y; h text height)
J11: Bottom Overlay "1" at 41.59,34.25 h1.52 r270; Bottom Overlay "2" at 34.39,33.925 h1.52 r270; Bottom Overlay "5" at 41.54,28.9 h1.52 r270; Bottom Overlay "6" at 34.44,28.9 h1.52 r270